# Altium PCB FM375_TEST_BOARD.PcbDoc (part 1 of 2)
Units mm, origin at the board's own origin, x right, y up, seen from the top; angles counter-clockwise.
Board outline 713.36 x 446.91 mm, 2 copper layers (Top Layer, Bottom Layer); 207 components, 223 nets, 969 pads, 41 vias.
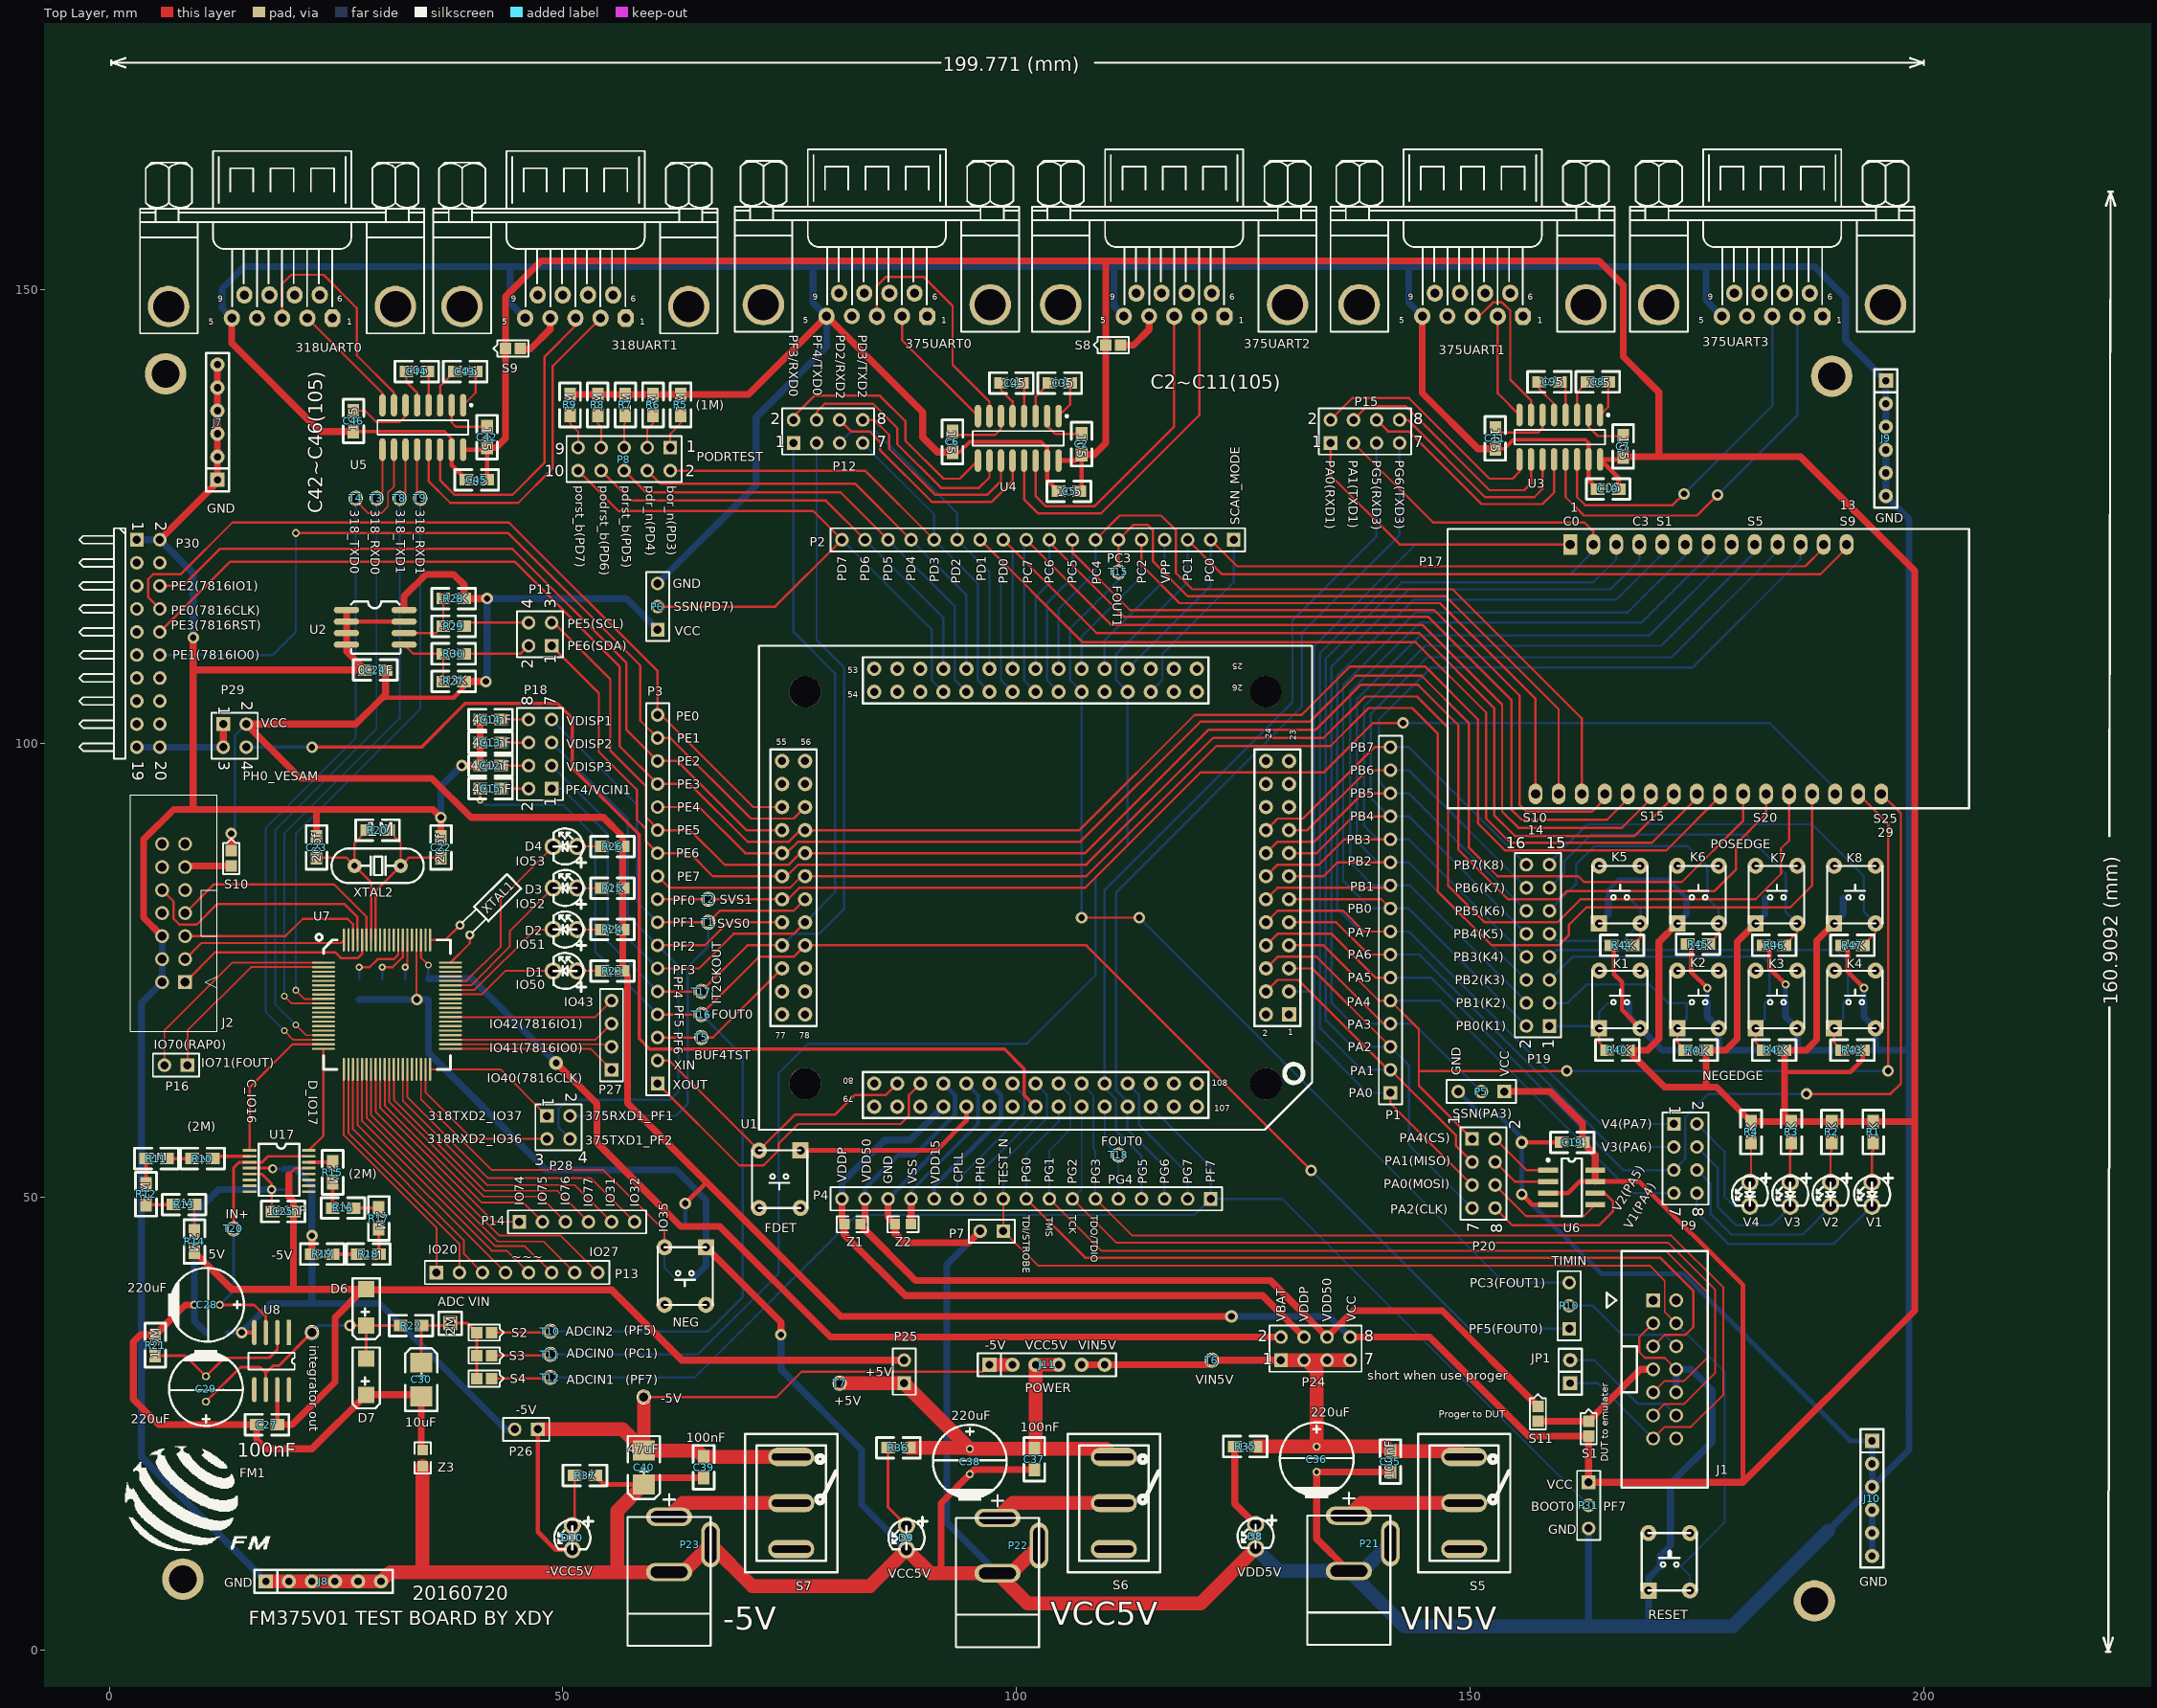
[diagram p0: Top Layer view]
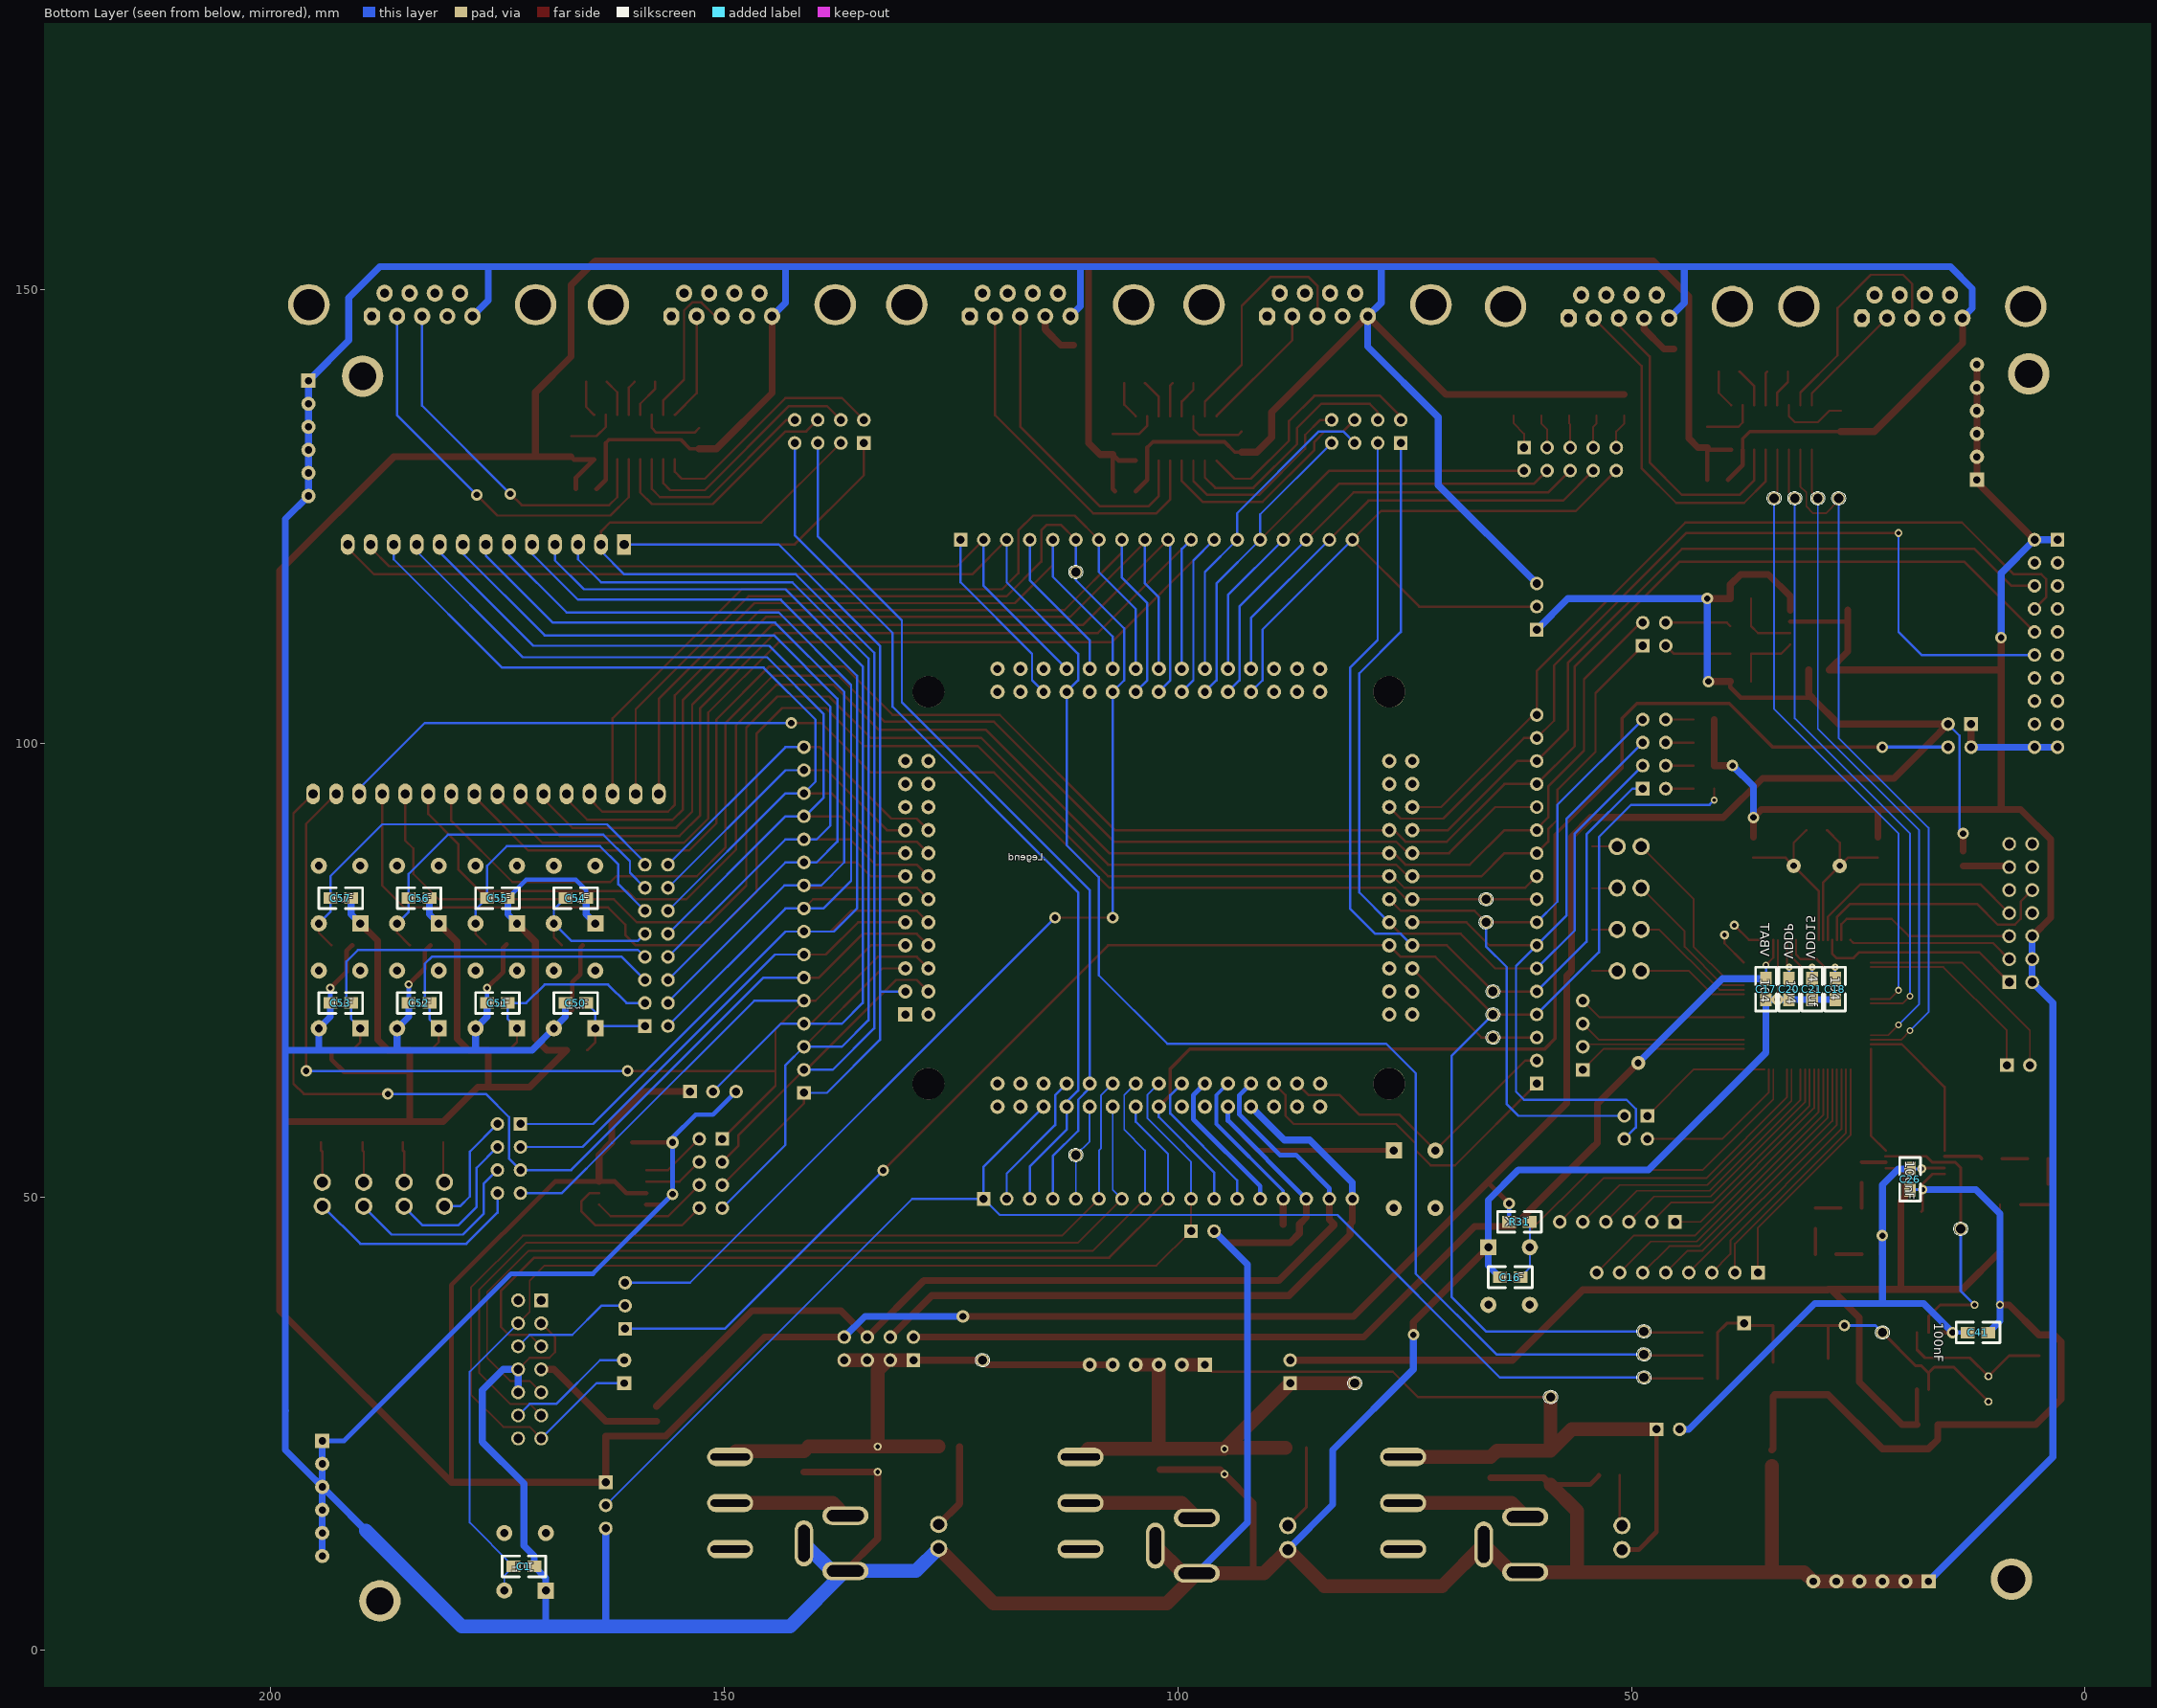
[diagram p1: Bottom Layer view, seen from below]

## Layer stack, top to bottom
Top Layer: signal copper 0.0356
Dielectric: dielectric 0.32, FR-4, Dk 4.8
Bottom Layer: signal copper 0.0356

## Board outline
-164.084,260.985 -164.084,-185.293 549.275,-185.293 549.275,261.62

## Design rules (kind name [scope] priority, off if disabled: settings)
Clearance [All] p1: gap=0.203
HoleSize [All] p1: absolutevalues=TRUE maxlimit=12.7 minlimit=0.025 maxpercent=80.000 minpercent=20.000
MinimumSolderMaskSliver [All] p1: minsoldermaskwidth=0
PolygonConnect [All] p1: connectstyle=Relief reliefconductorwidth=0.254 reliefentries=4 polygonreliefangle="90 Angle"
RoutingVias [All] p1: holewidth=0.711 width=1.27 viastyle="Through Hole" minholewidth=0.711 minwidth=1.27 maxholewidth=0.711 maxwidth=1.27
SilkToSilkClearance [All] p1: silktosilkclearance=0
SilkscreenOverComponentPads [All] p1: minsilkscreentomaskgap=0
SolderMaskExpansion [All] p1: expansion=0.102
TestPointUsage [All] p1: valid=0 allowmultiple=FALSE
Testpoint [All] p1: side=15 testpointundercomponent=TRUE minsize=1.016 maxsize=2.54 preferedsize=1.524 minholesize=0 maxholesize=1.016 preferedholesize=0.813 testpointgrid=0.025 style=1023 order=0-112345678
Width [All] p1: maxlimit=2.54 minlimit=0.152 preferedwidth=0.254
20 further rules are at their usual default settings.

## Components (designator, comment, footprint, x,y, rotation, side; value= is the part's Value field where it differs from the comment)
318UART0 "D Connector 9" DB9RA/M 24.613,146.863 r0 top
318UART1 "D Connector 9" DB9RA/M 56.947,146.863 r0 top
375UART0 "D Connector 9" DB9RA/M 90.17,147.066 r0 top
375UART1 "D Connector 9" DB9RA/M 155.829,147.066 r0 top
375UART2 "D Connector 9" DB9RA/M 122.936,147.066 r0 top
375UART3 "D Connector 9" DB9RA/M 188.849,147.066 r0 top
-5V "-5V" TEST_PT 58.928,27.94 r90 top
"ADC VIN" "ADCIN2" SIP1 37.592,36.068 r90 top
C1 "1uF" 0805 173.228,9.271 r180 bottom
C2 "105" 0805 107.188,134.112 r270 top
C3 "105" 0805 103.632,139.7 r0 top
C4 "105" 0805 100.584,139.7 r180 top
C5 "105" 0805 104.648,127.762 r0 top
C6 "105" 0805 92.964,134.366 r270 top
C7 "105" 0805 166.878,133.858 r270 top
C8 "105" 0805 162.941,139.827 r0 top
C9 "105" 0805 159.893,139.827 r180 top
C10 "105" 0805 164.084,128.016 r0 top
C11 "105" 0805 152.781,134.747 r270 top
C12 "470nF" 0805 43.18,97.536 r180 top
C13 "470nF" 0805 43.18,100.076 r180 top
C14 "470nF" 0805 43.18,102.616 r180 top
C15 "470nF" 0805 43.18,94.996 r180 top
C16 "1uF" 0805 62.23,41.148 r0 bottom
C17 "104" 0805 35.179,71.755 r90 bottom
C18 "104" 0805 27.559,71.755 r90 bottom
C19 "104" 0805 160.13,56.007 r0 top
C20 "104" 0805 32.639,71.755 r90 bottom
C21 "4.7uf" 0805 30.099,71.755 r90 bottom
C22 "20pf" 0805 36.576,87.376 r90 top
C23 "20pf" 0805 22.86,87.376 r90 top
C24 "0.1uF" 0805 28.194,108.077 r0 top
C25 "100nF" 0805 18.034,48.387 r0 top
C26 "100nF" 0805 19.304,50.8 r90 bottom
C27 "100nF" 0805 16.256,24.892 r0 top
C28 "220uF" NSM-EC 12.192,38.1 r90 top
C29 "220uF" NSM-EC 10.668,27.432 r0 top
C30 "10uF" SMD电容_B型_1 34.417,31.75 r90 top
C35 "100nF" 0805 141.224,21.971 r270 top
C36 "220uF" NSM-EC 133.096,22.479 r180 top
C37 "100nF" 0805 101.981,22.225 r270 top
C38 "220uF" NSM-EC 94.869,22.225 r180 top
C39 "100nF" 0805 65.532,21.336 r270 top
C40 "47uF" SMD电容_B型_1 58.928,18.288 r270 top
C41 "100nF" 0805 12.954,35.052 r180 bottom
C42 "105" 0805 41.656,134.874 r270 top
C43 "105" 0805 38.1,140.97 r0 top
C44 "105" 0805 35.052,140.97 r180 top
C45 "105" 0805 39.37,129.032 r0 top
C46 "105" 0805 26.924,134.366 r90 top
C50 "1uF" 0805 165.227,71.374 r0 bottom
C51 "1uF" 0805 173.863,71.374 r0 bottom
C52 "1uF" 0805 182.499,71.374 r0 bottom
C53 "1uF" 0805 191.135,71.374 r0 bottom
C54 "1uF" 0805 165.227,82.931 r0 bottom
C55 "1uF" 0805 173.863,82.931 r0 bottom
C56 "1uF" 0805 182.499,82.931 r0 bottom
C57 "1uF" 0805 191.135,82.931 r0 bottom
D1 "LED1" LED-DIODE0.1-BIGHOLE 51.536,74.904 r270 top
D2 "LED2" LED-DIODE0.1-BIGHOLE 51.536,79.476 r270 top
D3 "LED3" LED-DIODE0.1-BIGHOLE 51.536,84.048 r270 top
D4 "LED4" LED-DIODE0.1-BIGHOLE 51.536,88.62 r270 top
D6 "Diode" DIODE_M7 28.321,35.814 r90 top
D7 "Diode" DIODE_M7 28.321,28.194 r90 top
D8 "VDD5V" LED-DIODE0.1-BIGHOLE 126.365,13.843 r0 top
D9 "VCC5V" LED-DIODE0.1-BIGHOLE 87.884,13.716 r0 top
D10 "-VCC5V" LED-DIODE0.1-BIGHOLE 51.054,13.716 r0 top
FDET "KEY" BUTTON-S 76.2,48.768 r180 top
FM1 "FMSH_LOGO" FMSH-LOGO-1 1.524,22.86 r0 top
"integrator out" "MCO" TEST_PT 22.352,35.052 r90 top
J1 "GBI" HDR7X2-LP 170.18,38.608 r180 top
J2 "JTAG_318" JTAG_BIRD 7.112,81.28 r0 top
J7 "GND" SIP6 11.938,129.032 r90 top
J8 "GND" SIP6 17.272,7.62 r0 top
J9 "GND" SIP6 195.834,139.954 r270 top
J10 "GND" SIP6 194.31,23.114 r270 top
J11 "POWER" SIP6 97.028,31.496 r0 top
JP1 "" SIP2 161.036,29.464 r90 top
K1 "KEY" BUTTON-S 164.211,74.93 r0 top
K2 "KEY" BUTTON-S 172.847,74.93 r0 top
K3 "KEY" BUTTON-S 181.483,74.93 r0 top
K4 "KEY" BUTTON-S 190.119,74.93 r0 top
K5 "KEY" BUTTON-S 164.211,86.487 r0 top
K6 "KEY" BUTTON-S 172.847,86.487 r0 top
K7 "KEY" BUTTON-S 181.483,86.487 r0 top
K8 "KEY" BUTTON-S 190.119,86.487 r0 top
NEG "KEY" BUTTON-S 65.786,38.1 r180 top
P1 "IO_TEST_CON" HDR1X16 141.224,61.468 r90 top
P2 "IO_TEST_CON" HDR1X18 123.952,122.428 r180 top
P3 "IO_TEST_CON" HDR1X17 60.452,62.484 r90 top
P4 "IO_TEST_CON" HDR1X17 121.412,49.784 r180 top
P5 "SSN" HDR1X3 153.784,61.608 r180 top
P6 "SSN" HDR1X3 60.452,112.522 r90 top
P7 "Header 2" HDR1X2 98.552,46.228 r180 top
P8 "PODRTEST" HDR2X5 61.849,132.588 r180 top
P9 "Header 4X2" HDR2X4 172.466,58.039 r270 top
P10 "TIMIN" HDR1X3 160.931,35.458 r90 top
P11 "I2C_CON" HDR2X2 48.768,110.744 r90 top
P12 "Header 4X2" HDR2X4 75.438,133.096 r0 top
P13 "Header 8" HDR1X8 36.068,41.656 r0 top
P14 "Header 6" HDR1X6 45.212,47.244 r0 top
P15 "Header 4X2" HDR2X4 134.62,133.096 r0 top
P16 "Header 2" HDR1X2 8.636,64.516 r180 top
P17 "JX-H2154" JX-H2154 161.036,121.92 r0 top
P18 "DISP_CON" HDR2X4 48.768,94.996 r90 top
P19 "Header 8X2" HDR2X8 158.75,68.834 r90 top
P20 "Header 4X2" HDR2X4 150.224,56.388 r270 top
P21 "VIN5V" POWERJACK 136.652,14.859 r270 top
P22 "VCC5V" POWERJACK 97.917,14.605 r270 top
P23 "-5V" POWERJACK 61.722,14.732 r270 top
P24 "Header 4X2" HDR2X4 129.159,32.004 r0 top
P25 "Header 2" HDR1X2 87.63,29.464 r90 top
P26 "Header 2" HDR1X2 47.244,24.384 r180 top
P27 "Header 4" HDR1X4 55.372,64.008 r90 top
P28 "Header 2X2" HDR2X2 48.26,58.928 r270 top
P29 "Header 2X2" HDR2X2 12.573,102.108 r270 top
P30 "Header 10X2H" HDR2X10H 3.048,122.428 r270 top
P31 "BOOT0" HDR1X3 163.068,18.542 r270 top
R1 "1K" 0805 194.437,58.293 r270 top
R2 "1K" 0805 189.865,58.293 r270 top
R3 "1K" 0805 185.42,58.293 r270 top
R4 "1K" 0805 180.975,58.293 r270 top
R5 "1M" 0805 62.992,136.144 r90 top
R6 "1M" 0805 59.944,136.144 r90 top
R7 "1M" 0805 56.896,136.144 r90 top
R8 "1M" 0805 53.848,136.144 r90 top
R9 "1M" 0805 50.8,136.144 r90 top
R10 "2M" 0805 9.144,54.229 r0 top
R11 "2M" 0805 4.064,54.229 r0 top
R12 "2M" 0805 4.064,49.149 r90 top
R13 "2M" 0805 7.112,49.149 r0 top
R14 "2M" 0805 9.398,46.228 r270 top
R15 "2M" 0805 24.638,53.848 r270 top
R16 "2M" 0805 24.638,48.768 r0 top
R17 "2M" 0805 29.718,48.768 r270 top
R18 "2M" 0805 29.718,43.688 r180 top
R19 "2M" 0805 24.638,43.688 r180 top
R20 "1M" 0805 28.448,90.424 r0 top
R21 "1.5M" 0805 5.08,32.512 r90 top
R22 "2M" 0805 34.417,35.814 r180 top
R23 "1K" 0805 56.616,74.904 r180 top
R24 "1K" 0805 56.616,79.476 r180 top
R25 "1K" 0805 56.617,84.023 r180 top
R26 "1K" 0805 56.616,88.62 r180 top
R27 "3.3K" 0805 39.116,106.807 r180 top
R28 "3.3K" 0805 39.116,115.951 r180 top
R29 "300" 0805 36.83,112.903 r0 top
R30 "300" 0805 39.116,109.855 r180 top
R31 "10K" 0805 61.214,47.244 r0 bottom
R35 "1K" 0805 126.365,22.479 r180 top
R36 "1K" 0805 88.138,22.352 r180 top
R37 "1K" 0805 53.594,19.304 r180 top
R40 "10K" 0805 165.1,66.167 r0 top
R41 "10K" 0805 173.736,66.167 r0 top
R42 "10K" 0805 182.372,66.167 r0 top
R43 "10K" 0805 191.008,66.167 r0 top
R44 "10K" 0805 165.608,77.724 r0 top
R45 "10K" 0805 173.99,77.851 r0 top
R46 "10K" 0805 182.372,77.724 r0 top
R47 "10K" 0805 191.008,77.724 r0 top
RESET "KEY" BUTTON-S 169.672,12.954 r0 top
S1 "SHORT" 0603_SHORT_Y 163.068,25.273 r270 top
S2 "JUMPER" 0603_SHORT_Y 42.164,35.052 r180 top
S3 "JUMPER" 0603_SHORT_Y 42.164,32.512 r180 top
S4 "JUMPER" 0603_SHORT_Y 42.164,29.972 r180 top
S5 "SW-SPDT" SW2 149.352,21.336 r270 top
S6 "SW-SPDT" SW2 110.744,21.336 r270 top
S7 "SW-SPDT" SW2 75.184,21.336 r270 top
S8 "JUMPER" 0603_SHORT_Y 109.855,143.891 r0 top
S9 "JUMPER" 0603_SHORT_Y 43.688,143.51 r0 top
S10 "SHORT" 0603_SHORT_Y 13.462,88.138 r270 top
S11 "SHORT" 0603_SHORT_Y 157.48,26.924 r270 top
T1 "SVS0" TEST_PT 66.04,80.264 r0 top
T2 "SVS1" TEST_PT 66.04,82.804 r0 top
T3 "318_RXD0" TEST_PT 29.464,127 r0 top
T4 "318_TXD0" TEST_PT 27.178,127 r0 top
T5 "BUF4TST" TEST_PT 65.278,67.564 r0 top
T6 "VIN5V" TEST_PT 121.539,32.004 r0 top
T7 "+5V" TEST_PT 80.518,29.464 r0 top
T8 "318_TXD1" TEST_PT 32.004,127 r0 top
T9 "318_RXD1" TEST_PT 34.29,127 r0 top
T10 "ADCIN2" TEST_PT 48.641,35.179 r90 top
T11 "ADCIN0" TEST_PT 48.641,32.639 r0 top
T12 "ADCIN1" TEST_PT 48.641,30.099 r90 top
T15 "FOUT1" TEST_PT 111.252,118.872 r90 top
T16 "FOUT0" TEST_PT 65.278,70.104 r90 top
T17 "IT2CKOUT" TEST_PT 65.278,72.644 r90 top
T18 "FOUT0" TEST_PT 111.252,54.61 r90 top
T20 "IN+" TEST_PT 13.716,46.482 r180 top
U1 "FM375_SOCKET108" SOCKET108_LARGE 130.048,70.104 r180 top
U2 "24C32" SOIC8_SOP8 26.162,114.681 r0 top
U3 "MAX232CSE" NSO16_M 159.893,133.731 r270 top
U4 "MAX232CSE" NSO16_M 100.203,133.604 r270 top
U5 "MAX232CSE" NSO16_M 34.569,134.809 r270 top
U6 "25D40VS" SOP8-1.27 158.606,52.959 r0 top
U7 "FM318_LQFP80" LQFP80_12x12 23.622,75.819 r0 top
U8 "OPA2237" OPA237_SO8 19.812,35.052 r270 top
U17 "MAX312L" TSSOP16 15.494,55.118 r270 top
V1 "LED" LED-DIODE0.1-BIGHOLE 194.31,51.562 r0 top
V2 "LED" LED-DIODE0.1-BIGHOLE 189.738,51.562 r0 top
V3 "LED" LED-DIODE0.1-BIGHOLE 185.293,51.562 r0 top
V4 "LED" LED-DIODE0.1-BIGHOLE 180.848,51.562 r0 top
XTAL1 "32K" XTAL-RB32K_2 39.751,78.867 r135 top
XTAL2 "8M" XTAL-RAD0.2 27.051,86.487 r0 top
Z1 "MBs" 0603 82.804,46.99 r180 top
Z2 "MBs" 0603 88.392,46.99 r180 top
Z3 "MBs" 0603 34.544,22.098 r270 top

## Footprints (in the part's own frame and the unit in brackets; to place one, negate y for a bottom-side part, rotate by r counter-clockwise, add the part's x,y. Pads: shape width x height; smd on the part's side, far side on the other; paste and mask are expansions set on the pad)
0603 [mil]
  rect 45x45 smd: 1(0,0) 2(70,0)
  silkscreen extent -33,-35 102,36
0603_SHORT_Y [mil]
  rect 50x50 smd: 1(0,0) 2(65,0)
  silkscreen extent -52,-35 100,35
0805 [mil]
  rect 60x50 smd: 1(0,0) 2(90,0)
  silkscreen extent -50,-45 140,45
BUTTON-S [mil]
  rect 70x70 hole 35: 1(0,-250)
  round 70 hole 35: 2(180,-250) 3(0,0) 4(180,0)
  silkscreen extent -30,-250 210,0
DB9RA/M [mil]
  oct 70x75 hole 40: 1(0,0)
  oval 70x75 hole 40: 2(-109.17,0) 3(-218.33,0) 5(-436.67,0) 6(-55,100) 7(-164.17,100) 8(-273.33,100) 9(-382.5,100)
  round 70 hole 40: 4(-327.5,0)
  round 180 hole 135: BO1(-710.83,50) BO2(273.33,50)
  silkscreen extent -835,-67 398,725
DIODE_M7 [mm]
  rect 1.8x1.8 smd: 1(0,0) 2(4,0)
  silkscreen extent -1.5,-1.5 5.2,1.5
FMSH-LOGO-1 [mm]
  silkscreen extent 0.3,-11.8 16.23,-0.37
HDR1X2 [mm] "Connector; Header; 2 Position"
  rect 1.5x1.5 hole 0.9: 1(0,0)
  round 1.5 hole 0.9: 2(2.54,0)
  silkscreen extent -1.27,-1.27 3.81,1.27
HDR1X3 [mm] "Connector; Header; 3 Position"
  rect 1.5x1.5 hole 0.9: 1(0,0)
  round 1.5 hole 0.9: 2(2.54,0) 3(5.08,0)
  silkscreen extent -1.27,-1.27 6.35,1.27
HDR1X4 [mm] "Connector; Header; 4 Position"
  rect 1.5x1.5 hole 0.9: 1(0,0)
  round 1.5 hole 0.9: 2(2.54,0) 3(5.08,0) 4(7.62,0)
  silkscreen extent -1.27,-1.27 8.89,1.27
HDR1X6 [mm] "Connector; Header; 6 Position"
  rect 1.5x1.5 hole 0.9: 1(0,0)
  round 1.5 hole 0.9: 2(2.54,0) 3(5.08,0) 4(7.62,0) 5(10.16,0) 6(12.7,0)
  silkscreen extent -1.27,-1.27 13.97,1.27
HDR1X8 [mm] "Connector; Header; 8 Position"
  rect 1.5x1.5 hole 0.9: 1(0,0)
  round 1.5 hole 0.9: 2(2.54,0) 3(5.08,0) 4(7.62,0) 5(10.16,0) 6(12.7,0) 7(15.24,0) 8(17.78,0)
  silkscreen extent -1.27,-1.27 19.05,1.27
HDR1X16 [mm] "Connector; Header; 16 Position"
  rect 1.5x1.5 hole 0.9: 1(0,0)
  round 1.5 hole 0.9: 2(2.54,0) 3(5.08,0) 4(7.62,0) 5(10.16,0) 6(12.7,0) 7(15.24,0) 8(17.78,0) 9(20.32,0) 10(22.86,0) 11(25.4,0) 12(27.94,0) 13(30.48,0) 14(33.02,0) 15(35.56,0) 16(38.1,0)
  silkscreen extent -1.27,-1.27 39.37,1.27
HDR1X17 [mm] "Connector; Header; 17 Position"
  rect 1.5x1.5 hole 0.9: 1(0,0)
  round 1.5 hole 0.9: 2(2.54,0) 3(5.08,0) 4(7.62,0) 5(10.16,0) 6(12.7,0) 7(15.24,0) 8(17.78,0) 9(20.32,0) 10(22.86,0) 11(25.4,0) 12(27.94,0) 13(30.48,0) 14(33.02,0) 15(35.56,0) 16(38.1,0) 17(40.64,0)
  silkscreen extent -1.27,-1.27 41.91,1.27
HDR1X18 [mm] "Connector; Header; 18 Position"
  rect 1.5x1.5 hole 0.9: 1(0,0)
  round 1.5 hole 0.9: 2(2.54,0) 3(5.08,0) 4(7.62,0) 5(10.16,0) 6(12.7,0) 7(15.24,0) 8(17.78,0) 9(20.32,0) 10(22.86,0) 11(25.4,0) 12(27.94,0) 13(30.48,0) 14(33.02,0) 15(35.56,0) 16(38.1,0) 17(40.64,0) 18(43.18,0)
  silkscreen extent -1.27,-1.27 44.45,1.27
HDR2X2 [mm] "Connector; Header; 2x2 Position"
  rect 1.5x1.5 hole 0.9: 1(0,0)
  round 1.5 hole 0.9: 2(0,2.54) 3(2.54,0) 4(2.54,2.54)
  silkscreen extent -1.27,-1.27 3.81,3.81
HDR2X4 [mm] "Connector; Header; 4x2 Position"
  rect 1.5x1.5 hole 0.9: 1(0,0)
  round 1.5 hole 0.9: 2(0,2.54) 3(2.54,0) 4(2.54,2.54) 5(5.08,0) 6(5.08,2.54) 7(7.62,0) 8(7.62,2.54)
  silkscreen extent -1.27,-1.27 8.89,3.81
HDR2X5 [mm] "Connector; Header; 5x2 Position"
  rect 1.5x1.5 hole 0.9: 1(0,0)
  round 1.5 hole 0.9: 2(0,2.54) 3(2.54,0) 4(2.54,2.54) 5(5.08,0) 6(5.08,2.54) 7(7.62,0) 8(7.62,2.54) 9(10.16,0) 10(10.16,2.54)
  silkscreen extent -1.27,-1.27 11.43,3.81
HDR2X8 [mm] "Connector; Header; 8x2 Position"
  rect 1.5x1.5 hole 0.9: 1(0,0)
  round 1.5 hole 0.9: 2(0,2.54) 3(2.54,0) 4(2.54,2.54) 5(5.08,0) 6(5.08,2.54) 7(7.62,0) 8(7.62,2.54) 9(10.16,0) 10(10.16,2.54) 11(12.7,0) 12(12.7,2.54) 13(15.24,0) 14(15.24,2.54) 15(17.78,0) 16(17.78,2.54)
  silkscreen extent -1.27,-1.27 19.05,3.81
HDR2X10H [mm] "Connector; Header; 10x2 Position; Right Angle"
  rect 1.5x1.5 hole 0.9: 1(0,0)
  round 1.5 hole 0.9: 2(0,2.54) 3(2.54,0) 4(2.54,2.54) 5(5.08,0) 6(5.08,2.54) 7(7.62,0) 8(7.62,2.54) 9(10.16,0) 10(10.16,2.54) 11(12.7,0) 12(12.7,2.54) 13(15.24,0) 14(15.24,2.54) 15(17.78,0) 16(17.78,2.54) 17(20.32,0) 18(20.32,2.54) 19(22.86,0) 20(22.86,2.54)
  silkscreen extent -1.27,-6.35 24.13,-1.27
HDR7X2-LP [mil]
  rect 60x60 / inner round 60 / far side rect 60x60 hole 40: 1(0,0)
  round 60 hole 40: 2(-100,0) 3(0,100) 4(-100,100) 5(0,200) 6(-100,200) 7(0,300) 8(-100,300) 9(0,400) 10(-100,400) 11(0,500) 12(-100,500) 13(0,600) 14(-100,600)
  silkscreen extent -237,-213 201,812
JTAG_BIRD [mil]
  rect 60x60 / inner round 60 / far side rect 60x60 hole 40: 1(50,-300)
  round 60 hole 40: 2(-50,-300) 3(50,-200) 4(-50,-200) 5(50,-100) 6(-50,-100) 7(50,0) 8(-50,0) 9(50,100) 10(-50,100) 11(50,200) 12(-50,200) 13(50,300) 14(-50,300)
  silkscreen extent -188,-512 188,512
JX-H2154 [mil]
  rect 60x90 hole 40: 1(0,0)
  oval 60x90 hole 40: 2(100,0) 3(200,0) 4(300,0) 5(400,0) 6(500,0) 7(600,0) 8(700,0) 9(800,0) 10(900,0) 11(1000,0) 12(1100,0) 13(1200,0) 14(-150,-1082.68) 15(-50,-1082.68) 16(50,-1082.68) 17(150,-1082.68) 18(250,-1082.68) 19(350,-1082.68) 20(450,-1082.68) 21(550,-1082.68) 22(650,-1082.68) 23(750,-1082.68) 24(850,-1082.68) 25(950,-1082.68) 26(1050,-1082.68) 27(1150,-1082.68) 28(1250,-1082.68) 29(1350,-1082.68)
  silkscreen extent -532,-1146 1732,67
LED-DIODE0.1-BIGHOLE [mil]
  round 75 hole 48: A(0,2) K(0,-102)
  silkscreen extent -78,-100 90,40
LQFP80_12x12 [mm]
  oval 2.54x0.24 smd: 1(0,0) 2(0,-0.5) 3(0,-1) 4(0,-1.5) 5(0,-2) 6(0,-2.5) 7(0,-3) 8(0,-3.5) 9(0,-4) 10(0,-4.5) 11(0,-5) 12(0,-5.5) 13(0,-6) 14(0,-6.5) 15(0,-7) 16(0,-7.5) 17(0,-8) 18(0,-8.5) 19(0,-9) 20(0,-9.5) 41(14,-9.5) 42(14,-9) 43(14,-8.5) 44(14,-8) 45(14,-7.5) 46(14,-7) 47(14,-6.5) 48(14,-6) 49(14,-5.5) 50(14,-5) 51(14,-4.5) 52(14,-4) 53(14,-3.5) 54(14,-3) 55(14,-2.5) 56(14,-2) 57(14,-1.5) 58(14,-1) 59(14,-0.5) 60(14,0)
  oval 0.24x2.54 smd: 21(2.25,-11.75) 22(2.75,-11.75) 23(3.25,-11.75) 24(3.75,-11.75) 25(4.25,-11.75) 26(4.75,-11.75) 27(5.25,-11.75) 28(5.75,-11.75) 29(6.25,-11.75) 30(6.75,-11.75) 31(7.25,-11.75) 32(7.75,-11.75) 33(8.25,-11.75) 34(8.75,-11.75) 35(9.25,-11.75) 36(9.75,-11.75) 37(10.25,-11.75) 38(10.75,-11.75) 39(11.25,-11.75) 40(11.75,-11.75) 61(11.75,2.5) 62(11.25,2.5) 63(10.75,2.5) 64(10.25,2.5) 65(9.75,2.5) 66(9.25,2.5) 67(8.75,2.5) 68(8.25,2.5) 69(7.75,2.5) 70(7.25,2.5) 71(6.75,2.5) 72(6.25,2.5) 73(5.75,2.5) 74(5.25,2.5) 75(4.75,2.5) 76(4.25,2.5) 77(3.75,2.5) 78(3.25,2.5) 79(2.75,2.5) 80(2.25,2.5)
  silkscreen extent -0.83,-11.75 14,3.15
NSM-EC [mil]
  round 35 hole 20: 1(0,0) 2(0,110)
  silkscreen extent -160,-105 160,225
NSO16_M [mm] "16-Pin Small Outline Integrated Circuit 1.27 mm Pitch, IPC Low Density"
  oval 2.5x0.7 smd: 1(-2.45,4.445) 2(-2.45,3.175) 3(-2.45,1.905) 4(-2.45,0.635) 5(-2.45,-0.635) 6(-2.45,-1.905) 7(-2.45,-3.175) 8(-2.45,-4.445) 9(2.45,-4.445) 10(2.45,-3.175) 11(2.45,-1.905) 12(2.45,-0.635) 13(2.45,0.635) 14(2.45,1.905) 15(2.45,3.175) 16(2.45,4.445)
  silkscreen extent -2.57,-5 0.8,5.47, body extent -2,-5 2,5, height 1.75
OPA237_SO8 [mm]
  rect 2.77x0.51 smd: 1(0,0)
  oval 2.77x0.51 smd: 2(0,-1.27) 3(0,-2.54) 4(0,-3.81) 5(6.3,-3.81) 6(6.3,-2.54) 7(6.3,-1.27) 8(6.3,0)
  silkscreen extent 2.22,-4.44 4.08,0.64
POWERJACK [mil]
  oval 80x200 hole 50 slot 160 at 90 deg: 1(0,0) 3(240,0)
  oval 200x80 hole 50 slot 160 at 0 deg: 2(120,180)
  silkscreen extent -99,-180 560,180
SIP1 [mil]
  rect 62x62 hole 35: 1(0,0)
  silkscreen extent -50,-50 50,50
SIP2 [mil]
  rect 62x62 hole 32: 1(0,0)
  round 62 hole 32: 2(100,0)
  silkscreen extent -50,-50 150,50
SIP6 [mil]
  rect 62x62 hole 32: 1(0,0)
  round 62 hole 32: 2(100,0) 3(200,0) 4(300,0) 5(400,0) 6(500,0)
  silkscreen extent -50,-50 550,50
SMD电容_B型_1 [mm]
  rect 2.2x2.4 smd: 1(-0.011,0.009) 2(-3.751,0.009)
  silkscreen extent -5.34,-1.74 1.58,1.77
SOCKET108_LARGE [mil]
  round 137.8 hole 137.8: 0(100,300) 0(100,-1400) 0(2100,-1400) 0(2100,300)
  rect 62x62 hole 35: 1(0,0)
  round 62 hole 35: 2(100,0) 3(0,-100) 4(100,-100) 5(0,-200) 6(100,-200) 7(0,-300) 8(100,-300) 9(0,-400) 10(100,-400) 11(0,-500) 12(100,-500) 13(0,-600) 14(100,-600) 15(0,-700) 16(100,-700) 17(0,-800) 18(100,-800) 19(0,-900) 20(100,-900) 21(0,-1000) 22(100,-1000) 23(0,-1100) 24(100,-1100) 25(400,-1500) 26(400,-1400) 27(500,-1500) 28(500,-1400) 29(600,-1500) 30(600,-1400) 31(700,-1500) 32(700,-1400) 33(800,-1500) 34(800,-1400) 35(900,-1500) 36(900,-1400) 37(1000,-1500) 38(1000,-1400) 39(1100,-1500) 40(1100,-1400) 41(1200,-1500) 42(1200,-1400) 43(1300,-1500) 44(1300,-1400) 45(1400,-1500) 46(1400,-1400) 47(1500,-1500) 48(1500,-1400) 49(1600,-1500) 50(1600,-1400) 51(1700,-1500) 52(1700,-1400) 53(1800,-1500) 54(1800,-1400) 55(2200,-1100) 56(2100,-1100) 57(2200,-1000) 58(2100,-1000) 59(2200,-900) 60(2100,-900) 61(2200,-800) 62(2100,-800) 63(2200,-700) 64(2100,-700) 65(2200,-600) 66(2100,-600) 67(2200,-500) 68(2100,-500) 69(2200,-400) 70(2100,-400) 71(2200,-300) 72(2100,-300) 73(2200,-200) 74(2100,-200) 75(2200,-100) 76(2100,-100) 77(2200,0) 78(2100,0) 79(1800,400) 80(1800,300) 81(1700,400) 82(1700,300) 83(1600,400) 84(1600,300) 85(1500,400) 86(1500,300) 87(1400,400) 88(1400,300) 89(1300,400) 90(1300,300) 91(1200,400) 92(1200,300) 93(1100,400) 94(1100,300) 95(1000,400) 96(1000,300) 97(900,400) 98(900,300) 99(800,400) 100(800,300) 101(700,400) 102(700,300) 103(600,400) 104(600,300) 105(500,400) 106(500,300) 107(400,400) 108(400,300)
  silkscreen extent -100,-1600 2300,500
SOIC8_SOP8 [mil]
  oval 110x28 smd: 1(0,0) 2(0,-50) 3(0,-100) 4(0,-150) 5(250,-150) 6(250,-100) 7(250,-50) 8(250,0)
  silkscreen extent 20,-190 235,36
SOP8-1.27 [mm]
  rect 2.2x0.6 smd: 1(0,0) 2(0,-1.27) 3(0,-2.54) 4(0,-3.81) 5(5.2,-3.81) 6(5.2,-2.54) 7(5.2,-1.27) 8(5.2,0)
  silkscreen extent -0.15,-5.08 3.7,1.27
SW2 [mil]
  oval 80x200 hole 30 slot 170 at 90 deg: 1(0,0) 2(200,0) 3(400,0)
  silkscreen extent -100,-200 500,200
TEST_PT [mil]
  round 55 hole 40: 1(0,0)
  silkscreen extent -30,-30 30,30
TSSOP16 [mm]
  rect 0.3x1.5 smd: 1(0,0) 2(0.65,0) 3(1.3,0) 4(1.95,0) 5(2.6,0) 6(3.25,0) 7(3.9,0) 8(4.55,0) 9(4.55,6.5) 10(3.9,6.5) 11(3.25,6.5) 12(2.6,6.5) 13(1.95,6.5) 14(1.3,6.5) 15(0.65,6.5) 16(0,6.5)
  silkscreen extent -0.72,1 5,5.5
XTAL-RAD0.2 [mil]
  round 62 hole 28: 1(0,0) 2(200,0)
  silkscreen extent -100,-75 300,75
XTAL-RB32K_2 [mil]
  round 40 hole 20: 1(0,0) 2(60,0)
  silkscreen extent -15,-300 73,-14

## Part data
318UART0 318UART1 375UART0 375UART1 375UART2 375UART3: "Receptacle Assembly, 9 Position, Right Angle"
-5V T3 T4 T6 T7 T8 T9 T20: library part TEST_POINT
"ADC VIN" T1 T2 T5 T10 T11 T12 T15 T16 T17 T18: library part TEST_POINT2
C1 C16 C19 C39: library part CAP, "一般瓷片电容、直插选用RAD0.1，贴片选用0805"
C2 C3 C4 C5 C6 C7 C8 C9 C10 C11 C42 C43 C44 C45 C46: library part CAP
C12 C13 C14 C15 C24 C25 C26 C27 C35 C37 C41 C50 C51 C52 C53 C54 C55 C56 C57: library part CAP, "Capacitor"
C17 C18 C20 C21 C22 C23: library part Cap, "Capacitor"
C28 C29 C36 C38: library part ELECTRO1
C30: library part "Cap Pol1", "Polarized Capacitor (Radial)"
C40: library part "Cap Pol2", "Polarized Capacitor (Axial)"
D1 D2 D3 D4 D8 D9 D10: library part LED
D6 D7: "Default Diode"
FDET K1 K2 K3 K4 K5 K6 K7 K8 NEG RESET: library part SW-PB, "乒乓球按键（压下后接通，松开自动断开），较大按键尺寸12mmX12mm选用BUTTON-L封装，较小尺寸6mmX6mm选用BUTTON-S封装"
"integrator out": library part TP
J1 J2: library part "Header 7X2", "Header, 7-Pin, Dual row"
J7 J8 J9 J10 J11: library part CON6, "6pin的连接器，一般直插封装选用SIP6（间距2.54mm）"
JP1: library part JUMPER, "Jumper"
P1: library part "Header 16", "Header, 16-Pin"
P2: library part "Header 18", "Header, 18-Pin"
P3 P4: library part "Header 17", "Header, 17-Pin"
P5 P6 P10 P31: library part "Header 3", "Header, 3-Pin"
P7 P16 P25 P26: "Header, 2-Pin"
P8: library part "Header 5X2", "Header, 5-Pin, Dual row"
P9 P12 P15 P20 P24: "Header, 4-Pin, Dual row"
P11: library part "Header 2X2", "Header, 2-Pin, Dual row"
P13: "Header, 8-Pin"
P14: "Header, 6-Pin"
P17: library part LCD_JX-H2154
P18: library part "Header 4X2", "Header, 4-Pin, Dual row"
P19: "Header, 8-Pin, Dual row"
P21 P22 P23: library part 9VPOWE
P27: "Header, 4-Pin"
P28 P29: "Header, 2-Pin, Dual row"
P30: "Header, 10-Pin, Dual row, Right Angle"
R1 R2 R3 R4 R23 R24 R25 R26: library part RES1, "电阻，1/4w的金属膜直插可选AXIAL0.4封装（长度10mm），贴片可选0805封装，其他电阻可选AXIAL0.5～AXIAL1.0"
R5 R6 R7 R8 R9 R20 R27 R28 R29 R30 R31 R35 R36 R37 R40 R41 R42 R43 R44 R45 R46 R47: library part RES1
R10 R11 R12 R13 R14 R15 R16 R17 R18 R19 R21 R22: library part Res2, "Resistor"
S2 S3 S4 S8 S9: library part SHORT
S5 S6 S7: "SPDT Subminiature Toggle Switch, Right Angle Mounting, Vertical Actuation"
U2: library part 24CXX
U3 U4 U5: library part MAX232, "CI-MAX232CPE"
XTAL1 XTAL2: library part CRYSTAL, "Crystal"

## Free pads (board coordinates)
  round 4.572 hole 3.048: ""(6.223,140.716) ""(8.128,7.874) ""(187.96,5.461) ""(189.865,140.462)

## Via types
v1: diameter 1.27, hole 0.711, Top Layer to Bottom Layer, 23 vias
v2: diameter 0.762, hole 0.406, Top Layer to Bottom Layer, 8 vias
v3: diameter 0.914, hole 0.508, Top Layer to Bottom Layer, 3 vias
v4: diameter 1.397, hole 0.762, Top Layer to Bottom Layer, 2 vias
v5: diameter 1.016, hole 0.559, Top Layer to Bottom Layer, 2 vias
v6: diameter 0.889, hole 0.483, Top Layer to Bottom Layer, 1 vias
v7: diameter 0.762, hole 0.381, Top Layer to Bottom Layer, 1 vias
v8: diameter 1.524, hole 0.762, Top Layer to Bottom Layer, 1 vias

## Nets (pads, with @x,y where several pads share a name; then routed paths per layer and width w, separated by ;. In a path a pad name is that pad's centre, name@x,y a point inside that pad or via, vN(x,y) a via of type N, cw(c..) or ccw(c..) an arc to the next point about the centre after c; other vN are vias at no path point)
7816CLK: P3.17 P30.8 U1.59 | length 92.1
  Top Layer w0.254: P30.8@5.588,114.808 4.318,116.078 4.318,118.11 4.826,118.618 7.874,118.618 13.589,124.333 44.069,124.333 60.452,107.95 P3.17@60.452,103.124 60.833,103.124 70.993,92.964 U1.59@74.168,92.964
7816IO0: P3.16 P30.12 U1.60 | length 100.2
  Top Layer w0.254: v6(20.574,123.19) 43.942,123.19 58.547,108.585 58.547,102.489 P3.16@60.452,100.584 61.849,100.584 70.739,91.694 75.438,91.694 U1.60@76.708,92.964
  Bottom Layer w0.254: P30.12@5.588,109.728 18.034,109.728 20.574,112.268 v6(20.574,123.19)
7816IO1: P3.15 P30.6 U1.61 | length 87.4
  Top Layer w0.254: P30.6@5.588,117.348 8.128,117.348 12.192,121.412 44.45,121.412 57.023,108.839 57.023,101.473 P3.15@60.452,98.044 62.611,98.044 70.231,90.424 U1.61@74.168,90.424
7816RST: P3.14 P17.22 P30.10 U1.62 | length 218.9
  Top Layer w0.254: P30.10@5.588,112.268 13.335,120.015 44.704,120.015 56.261,108.458 56.261,99.695 P3.14@60.452,95.504 64.008,95.504 70.358,89.154 74.93,89.154 76.2,90.424 U1.62@76.708,90.424 106.934,90.424 119.634,103.124 131.445,103.124 136.779,108.458 145.034,108.458 150.876,102.616 150.876,91.186 153.873,88.189 171.628,88.189 177.546,94.107 P17.22@177.546,94.42
-5V: C26.2 C41.1 P26.2 R19.2 U8.4 U17.4 | length 63
  Top Layer w0.305: U17.4@15.494,53.168 17.952,53.168 v5(18.034,53.086)
  Top Layer w0.508: v1(14.605,35.052) U8.4@16.002,35.052
  Top Layer w0.762: R19.2@22.352,43.688 v1(22.352,45.72)
  Bottom Layer w0.305: v5(18.034,53.086) C26.2@19.304,53.086
  Bottom Layer w0.508: C41.1@12.954,35.052 v1(14.605,35.052)
  Bottom Layer w0.762: v1(14.605,35.052) 17.806,38.253 22.352,38.253 ; C26.2@19.304,53.086 20.611,53.086 22.352,51.345 v1(22.352,45.72) 22.352,38.253 ; P26.2@44.704,24.384 43.688,24.384 29.819,38.253 22.352,38.253
-VCC5V: -5V.1 C39.1 C40.2 D10.K J11.1 J11.2 P26.1 S7.1 | length 93.1
  Top Layer w0.254: -5V.1@58.928,27.94 73.533,27.94 76.327,30.734 96.266,30.734 J11.1@97.028,31.496
  Top Layer w0.508: P26.1@47.244,24.384 47.244,13.081 49.2,11.125 D10.K@51.054,11.125
  Top Layer w1.524: P26.1@47.244,24.384 56.592,24.384 C40.2@58.937,22.039 ; -5V.1@58.928,27.94 58.937,27.931 C40.2@58.937,22.039 ; S7.1@75.184,21.336 C39.1@65.532,21.336 64.829,22.039 C40.2@58.937,22.039 ; J11.1@97.028,31.496 J11.2@99.568,31.496
ADC0: P2.3 P17.13 S3.1 T11.1 U1.32 | length 225.9
  Top Layer w0.254: S3.1@42.164,32.512 48.514,32.512 T11.1@48.641,32.639 ; P2.3@118.872,122.428 122.682,118.618 188.595,118.618 191.516,121.539 P17.13@191.516,121.92
  Bottom Layer w0.254: T11.1@48.641,32.639 64.897,32.639 73.787,41.529 73.787,63.627 77.029,66.869 101.159,66.869 108.712,74.422 108.712,85.217 112.268,88.773 U1.32@112.268,105.664 110.998,106.934 110.998,109.855 118.872,117.729 P2.3@118.872,122.428
ADC1: P4.1 P31.2 S4.1 T12.1 U1.103 | length 156
  Top Layer w0.254: S4.1@42.164,29.972 48.514,29.972 T12.1@48.641,30.099
  Bottom Layer w0.254: T12.1@48.641,30.099 64.516,30.099 82.423,48.006 119.634,48.006 P4.1@121.412,49.784 ; U1.103@114.808,59.944 121.412,53.34 P4.1@121.412,49.784 ; P31.2@163.068,16.002 129.286,49.784 P4.1@121.412,49.784
ADC2: C15.2 P3.4 P10.1 S2.1 T10.1 T16.1 U1.72 | length 221.5
  Top Layer w0.254: v7(40.894,93.726) C15.2@40.894,94.996 ; S2.1@42.164,35.052 48.514,35.052 T10.1@48.641,35.179 ; P3.4@60.452,70.104 T16.1@65.278,70.104 71.628,76.454 75.438,76.454 U1.72@76.708,77.724 107.696,77.724 v1(132.498,52.922)
  Bottom Layer w0.254: v7(40.894,93.726) 41.402,93.218 50.038,93.218 53.594,89.662 53.594,76.962 P3.4@60.452,70.104 ; T10.1@48.641,35.179 66.04,35.179 69.85,38.989 69.85,65.532 T16.1@65.278,70.104 ; v1(132.498,52.922) 149.962,35.458 P10.1@160.931,35.458
AGND: C25.1 C26.1 C27.1 C28.2 C30.2 C41.2 D7.1 R21.2 U17.5 Z3.1 | length 88.8
  Top Layer w0.305: U17.5@15.494,52.518 16.824,52.518 17.907,51.435 v5(17.907,50.8) 17.907,48.514 C25.1@18.034,48.387
  Top Layer w0.762: C28.2@9.398,38.1 8.382,38.1 R21.2@5.08,34.798 3.429,34.798 2.667,34.036 2.667,27.686 5.461,24.892 C27.1@16.256,24.892 16.256,23.241 17.272,22.225 22.352,22.225 D7.1@28.321,28.194 34.213,28.194 C30.2@34.408,27.999 34.408,22.234 Z3.1@34.544,22.098
  Bottom Layer w0.305: v5(17.907,50.8) C26.1@19.304,50.8
  Bottom Layer w0.762: C41.2@10.668,35.052 9.398,36.322 C28.2@9.398,38.1 9.398,48.133 12.065,50.8 v5(17.907,50.8)
BD_TCK: J1.11 P4.7 U1.97 | length 103.6
  Top Layer w0.203: P4.7@106.172,49.784 110.998,44.958 171.831,44.958 177.038,39.751 177.038,30.607 173.609,27.178 171.45,27.178 J1.11@170.18,25.908
  Bottom Layer w0.203: P4.7@106.172,49.784 107.188,50.8 U1.97@107.188,59.944
BD_TDI: J1.5 P4.9 U1.95 | length 98.7
  Top Layer w0.254: P4.9@101.092,49.784 107.569,43.307 170.942,43.307 174.625,39.624 174.625,35.687 173.736,34.798 171.45,34.798 J1.5@170.18,33.528
  Bottom Layer w0.254: P4.9@101.092,49.784 101.092,54.737 104.648,58.293 U1.95@104.648,59.944
BD_TDO: J1.13 JP1.1 P4.6 U1.98 | length 119.8
  Top Layer w0.203: P4.6@108.712,49.784 112.776,45.72 172.212,45.72 177.927,40.005 177.927,28.194 174.371,24.638 171.45,24.638 J1.13@170.18,23.368
  Bottom Layer w0.203: U1.98@107.188,62.484 108.458,61.214 108.458,55.372 108.712,55.118 P4.6@108.712,49.784
  Bottom Layer w0.254: JP1.1@161.036,29.464 164.084,29.464 J1.13@170.18,23.368
BD_TMS: J1.9 P4.8 U1.96 | length 105.7
  Top Layer w0.203: P4.8@103.632,49.784 109.347,44.069 171.577,44.069 176.149,39.497 176.149,32.258 173.609,29.718 171.45,29.718 J1.9@170.18,28.448
  Bottom Layer w0.203: P4.8@103.632,49.784 103.632,55.118 105.918,57.404 105.918,61.214 U1.96@104.648,62.484
BOR_N: P2.14 P8.2 P12.7 U1.44 | length 65.5
  Top Layer w0.254: P8.2@61.849,130.048 83.312,130.048 P2.14@90.932,122.428
  Bottom Layer w0.254: P12.7@83.058,133.096 90.932,125.222 P2.14@90.932,122.428 95.758,117.602 95.758,106.934 U1.44@97.028,105.664
C_CHANEL: R10.2 U17.2 | length 4.2
  Top Layer w0.381: R10.2@11.43,54.229 11.669,54.468 U17.2@15.494,54.468
CHARGE: U7.19 U17.1 | length 17.1
  Top Layer w0.254: U17.1@15.494,55.118 15.494,62.103 20.21,66.819 U7.19@23.622,66.819
COM0: P1.1 P15.1 P17.1 P20.5 U1.3 | length 137
  Top Layer w0.254: P15.1@134.62,133.096 134.62,129.54 142.24,121.92 P17.1@161.036,121.92 ; P1.1@141.224,61.468 141.224,60.308 P20.5@150.224,51.308 P20.5@150.224,51.198
  Bottom Layer w0.254: U1.3@130.048,72.644 132.842,72.644 ; P1.1@141.224,61.468 138.684,61.468 132.842,67.31 132.842,72.644 ; P17.1@161.036,121.92 144.018,121.92 132.842,110.744 132.842,72.644
COM1: P1.2 P15.3 P17.2 P20.3 U1.4 | length 150.7
  Top Layer w0.254: U1.4@127.508,72.644 128.778,73.914 131.064,73.914 140.97,64.008 P1.2@141.224,64.008 148.463,56.769 148.463,55.609 P20.3@150.224,53.848 ; P15.3@137.16,133.096 145.923,124.333 162.609,124.333 163.576,123.366 P17.2@163.576,121.92
  Bottom Layer w0.254: P1.2@141.224,64.008 138.049,64.008 133.477,68.58 133.477,109.982 142.113,118.618 161.036,118.618 163.576,121.158 P17.2@163.576,121.92
COM2: P1.3 P17.3 P20.7 U1.5 | length 122.6
  Top Layer w0.254: U1.5@130.048,75.184 132.588,75.184 P1.3@141.224,66.548
  Bottom Layer w0.254: P20.7@150.224,48.768 143.256,55.736 143.256,64.516 P1.3@141.224,66.548 137.033,66.548 134.112,69.469 134.112,109.347 142.494,117.729 163.576,117.729 166.116,120.269 P17.3@166.116,121.92
COM3: P1.4 P5.2 P17.4 U1.6 | length 115.4
  Top Layer w0.254: U1.6@127.508,75.184 128.778,76.454 133.096,76.454 140.462,69.088 P1.4@141.224,69.088
  Bottom Layer w0.254: P5.2@151.244,61.608 143.764,69.088 P1.4@141.224,69.088 137.033,69.088 134.747,71.374 134.747,108.458 143.256,116.967 165.481,116.967 168.656,120.142 P17.4@168.656,121.92
CPLL: P4.12 U1.92 | length 16.3
  Bottom Layer w0.254: P4.12@93.472,49.784 93.472,51.816 100.838,59.182 100.838,61.214 U1.92@99.568,62.484
D_CHANEL: R15.1 U17.14 | length 2.7
  Top Layer w0.381: U17.14@21.994,53.818 24.608,53.818 R15.1@24.638,53.848
DISCHARGE: U7.20 U17.16 | length 11.9
  Top Layer w0.254: U17.16@21.994,55.118 23.622,56.746 U7.20@23.622,66.319
FM318_RXD0: T3.1 U5.9 U7.17 | length 72.8
  Top Layer w0.203: v2(20.574,68.961) 21.716,67.819 U7.17@23.622,67.819 ; T3.1@29.464,127 30.124,127.66 U5.9@30.124,132.359
  Bottom Layer w0.203: v2(20.574,68.961) 18.288,71.247 18.288,90.424 29.464,101.6 T3.1@29.464,127
FM318_RXD1: T9.1 U5.12 U7.9 | length 68.9
  Top Layer w0.203: v2(20.574,72.771) 21.526,71.819 U7.9@23.622,71.819 ; U5.12@33.934,132.359 33.934,127.356 T9.1@34.29,127
  Bottom Layer w0.203: v2(20.574,72.771) 20.574,90.043 34.29,103.759 T9.1@34.29,127
FM318_RXD2: P28.3 U7.39 | length 18.1
  Top Layer w0.203: U7.39@34.872,64.069 34.872,61.521 40.005,56.388 P28.3@48.26,56.388
FM318_TXD0: T4.1 U5.10 U7.18 | length 79.6
  Top Layer w0.203: v2(19.304,68.326) 20.311,67.319 U7.18@23.622,67.319 ; T4.1@27.178,127 27.178,126.746 28.575,125.349 29.972,125.349 30.734,126.111 30.734,127.635 31.394,128.295 U5.10@31.394,132.359
  Bottom Layer w0.203: v2(19.304,68.326) 17.272,70.358 17.272,90.678 27.178,100.584 T4.1@27.178,127
FM318_TXD1: T8.1 U5.11 U7.10 | length 70.4
  Top Layer w0.203: v2(19.304,72.136) 20.121,71.319 U7.10@23.622,71.319 ; T8.1@32.004,127 32.664,127.66 U5.11@32.664,132.359
  Bottom Layer w0.203: v2(19.304,72.136) 19.304,90.043 32.004,102.743 T8.1@32.004,127
FM318_TXD2: P28.1 U7.40 | length 15
  Top Layer w0.203: U7.40@35.372,64.069 43.119,64.069 P28.1@48.26,58.928
FM375_RXD0: P12.2 U4.9 | length 27.5
  Top Layer w0.254: P12.2@75.438,135.636 75.438,136.017 77.724,138.303 84.963,138.303 87.757,135.509 87.757,133.35 91.948,129.159 93.763,129.159 U4.9@95.758,131.154
FM375_RXD1: P15.2 U3.9 | length 27.2
  Top Layer w0.254: P15.2@134.62,135.636 137.033,138.049 143.256,138.049 152.146,129.159 154.686,129.159 155.448,129.921 U3.9@155.448,131.281
FM375_RXD2: P12.6 U4.12 | length 26.5
  Top Layer w0.254: P12.6@80.518,135.636 81.788,134.366 83.82,134.366 84.963,133.223 84.963,132.334 90.678,126.619 97.282,126.619 99.568,128.905 U4.12@99.568,131.154
FM375_RXD3: P15.6 U3.12 | length 27.6
  Top Layer w0.254: P15.6@139.7,135.636 140.97,134.366 143.256,134.366 151.257,126.365 157.988,126.365 159.258,127.635 U3.12@159.258,131.281
FM375_TXD0: P12.4 U4.10 | length 27.5
  Top Layer w0.254: P12.4@77.978,135.636 77.978,136.525 78.867,137.414 84.201,137.414 86.868,134.747 86.868,132.969 91.694,128.143 95.885,128.143 97.028,129.286 U4.10@97.028,131.154
FM375_TXD1: P15.4 U3.10 | length 27
  Top Layer w0.254: P15.4@137.16,135.636 138.684,137.16 142.875,137.16 152.146,127.889 155.956,127.889 156.718,128.651 U3.10@156.718,131.281
FM375_TXD2: P12.8 U4.11 | length 22.4
  Top Layer w0.254: P12.8@83.058,135.636 84.328,135.636 85.979,133.985 85.979,132.461 91.059,127.381 96.774,127.381 98.298,128.905 U4.11@98.298,131.154
FM375_TXD3: P15.8 U3.11 | length 22.9
  Top Layer w0.254: P15.8@142.24,135.636 143.129,135.636 151.638,127.127 157.099,127.127 157.988,128.016 U3.11@157.988,131.281
FOUT: P16.1 U7.2 | length 21.7
  Top Layer w0.203: P16.1@8.636,64.516 8.636,68.326 15.629,75.319 U7.2@23.622,75.319
GND: 318UART0.5 318UART1.5 375UART0.5 375UART1.5 375UART2.5 375UART3.5 C1.2 C5.1 C6.2 C10.1 C11.2 C12.2 C13.2 C14.2 C16.2 C17.1 C18.1 C19.1 C20.1 C21.1 C22.2 C23.2 C24.1 C35.2 C36.2 C37.2 C38.2 C39.2 C40.1 C45.1 C46.1 C50.2 C51.2 C52.2 C53.2 D8.K D9.K FDET.1 J1.3 J1.8 J1.10 J2.2 J2.4 J2.6 J7.1 J7.2 J7.3 J7.4 J7.5 J7.6 J8.1 J8.2 J8.3 J8.4 J8.5 J8.6 J9.1 J9.2 J9.3 J9.4 J9.5 J9.6 J10.1 J10.2 J10.3 J10.4 J10.5 J10.6 K1.2 K2.2 K3.2 K4.2 NEG.1 P4.15 P5.3 P6.3 P7.2 P21.2 P21.3 P22.2 P22.3 P23.2 P23.3 P30.1 P30.2 P31.3 R5.2 R6.2 R7.2 R8.2 R9.2 R37.1 R44.1 R45.1 R46.1 R47.1 RESET.1 U1.87 U2.1 U2.2 U2.3 U2.4 U2.7 U3.15 U4.15 U5.15 U6.4 U7.64 Z2.2 Z3.2 | length 1471.2
  Top Layer w0.203: v1@33.872,71.755 U7.64@33.872,78.319
  Top Layer w0.254: J1.3@170.18,36.068 168.656,34.544 168.656,32.892 169.29,32.258 171.45,32.258 J1.8@172.72,30.988
  Top Layer w0.381: C46.1@26.924,134.366 36.957,134.366 37.744,133.579 U5.15@37.744,132.359 ; C6.2@92.964,132.08 93.726,132.08 94.869,133.223 102.743,133.223 103.378,132.588 ; C11.2@152.781,132.461 153.797,132.461 154.813,133.477 162.687,133.477 163.068,133.096
  Top Layer w0.508: U2.2@26.162,113.411 U2.7@32.512,113.411 ; U5.15@37.744,132.359 37.744,130.658 C45.1@39.37,129.032 ; R37.1@53.594,19.304 54.599,18.299 C40.1@58.937,18.299 ; FDET.1@76.2,55.118 91.186,55.118 94.488,58.42 U1.87@94.488,59.944 ; 103.378,132.588 U4.15@103.378,131.154 103.378,129.032 C5.1@104.648,127.762 ; v1(155.702,50.292) 156.845,49.149 U6.4@158.606,49.149 ; v4(155.702,56.007) C19.1@160.13,56.007 ; 163.068,133.096 U3.15@163.068,131.281 163.068,129.032 C10.1@164.084,128.016 ; R44.1@165.608,77.724 165.862,77.47 165.862,74.549 166.751,73.66 166.751,70.612 K1.2@168.783,68.58 ; R45.1@173.99,77.851 174.371,77.47 174.371,74.803 v3(176.149,73.025) ; R46.1@182.372,77.724 183.007,77.089 183.007,75.184 v3(184.785,73.406) ; R47.1@191.008,77.724 191.643,77.089 191.643,74.803 v3(193.421,73.025)
  Top Layer w0.762: P30.2@5.588,122.428 11.938,128.778 J7.1@11.938,129.032 J7.2@11.938,131.572 J7.3@11.938,134.112 J7.4@11.938,136.652 J7.5@11.938,139.192 J7.6@11.938,141.732 ; J2.6@5.842,78.74 3.81,80.772 3.81,89.408 7.112,92.71 9.271,92.71 ; v1(9.271,111.633) 9.271,108.077 ; 318UART0.5@13.521,146.863 13.521,144.086 23.241,134.366 C46.1@26.924,134.366 ; C23.2@22.86,89.662 22.86,92.583 22.987,92.71 ; U2.1@26.162,114.681 U2.3@26.162,112.141 26.162,110.109 C24.1@28.194,108.077 9.271,108.077 ; C22.2@36.576,89.662 v1(36.576,91.821) 35.687,92.71 22.987,92.71 ; v1(38.862,97.536) C12.2@40.894,97.536 C13.2@40.894,100.076 C14.2@40.894,102.616 ; R9.2@50.8,138.43 R8.2@53.848,138.43 R7.2@56.896,138.43 R6.2@59.944,138.43 R5.2@62.992,138.43 70.443,138.43 375UART0.5@79.079,147.066 89.662,136.483 89.662,133.731 91.313,132.08 C6.2@92.964,132.08 ; C40.1@58.937,18.299 59.688,19.05 C39.2@65.532,19.05 ; NEG.1@65.786,44.45 74.041,36.195 v1(74.041,34.798) ; P4.15@85.852,49.784 85.852,47.752 Z2.2@86.614,46.99 86.614,45.974 87.63,44.958 94.742,44.958 P7.2@96.012,46.228 ; 91.694,8.509 91.694,16.256 C38.2@94.869,19.431 95.377,19.939 C37.2@101.981,19.939 ; P21.3@136.652,8.763 133.096,12.319 C36.2@133.096,19.685 C35.2@141.224,19.685 ; 375UART1.5@144.738,147.066 144.738,138.599 150.876,132.461 C11.2@152.781,132.461 ; 9.271,92.71 9.271,108.077 ; 9.271,92.71 22.987,92.71
  Top Layer w1.524: J8.1@17.272,7.62 J8.2@19.812,7.62 J8.3@22.352,7.62 J8.4@24.892,7.62 J8.5@27.432,7.62 J8.6@29.972,7.62 30.988,8.636 34.29,8.636 ; Z3.2@34.544,20.32 34.544,8.89 34.29,8.636 ; C40.1@58.937,18.299 56.007,15.369 56.007,8.636 ; P22.2@102.489,11.557 99.441,8.509 P22.3@97.917,8.509 ; D8.K@126.365,11.252 120.32,5.207 101.219,5.207 P22.3@97.917,8.509 ; 34.29,8.636 56.007,8.636 ; 56.007,8.636 P23.3@61.722,8.636 63.246,8.636 P23.2@66.294,11.684 70.866,7.112 83.871,7.112 D9.K@87.884,11.125 90.5,8.509 91.694,8.509 P22.3@97.917,8.509
  Bottom Layer w0.508: P4.15@85.852,49.784 94.488,58.42 U1.87@94.488,59.944 ; P5.3@148.704,61.608 151.257,59.055 153.162,59.055 155.702,56.515 v4(155.702,56.007) v1(155.702,50.292) 164.465,41.529 173.482,41.529 191.897,23.114 J10.1@194.31,23.114 ; C51.2@176.149,71.374 v3(176.149,73.025) ; C52.2@184.785,71.374 v3(184.785,73.406) ; C53.2@193.421,71.374 v3(193.421,73.025)
  Bottom Layer w0.762: P30.1@3.048,122.428 P30.2@5.588,122.428 9.271,118.745 v1(9.271,111.633) ; J2.6@5.842,78.74 J2.4@5.842,76.2 J2.2@5.842,73.66 3.556,71.374 3.556,59.944 3.556,21.336 J8.1@17.272,7.62 ; 318UART0.5@13.521,146.863 12.446,147.938 12.446,150.114 14.859,152.527 44.196,152.527 ; C18.1@27.559,71.755 C21.1@30.099,71.755 C20.1@32.639,71.755 v1(33.909,71.755) C17.1@35.179,71.755 35.179,65.913 48.133,52.959 62.484,52.959 65.786,49.657 NEG.1@65.786,44.45 65.786,42.418 C16.2@64.516,41.148 ; v1(36.576,91.821) 36.576,95.25 v1(38.862,97.536) ; 318UART1.5@45.855,146.863 44.196,148.522 44.196,152.527 ; P6.3@60.452,117.602 71.306,128.456 71.306,135.949 79.079,143.722 375UART0.5@79.079,147.066 77.597,148.548 77.597,152.527 ; v1(74.041,34.798) 74.041,30.988 82.931,22.098 82.931,16.078 D9.K@87.884,11.125 ; P7.2@96.012,46.228 92.329,42.545 92.329,14.097 P22.3@97.917,8.509 ; 375UART2.5@111.845,147.066 110.744,148.167 110.744,152.527 ; 375UART1.5@144.738,147.066 143.256,148.548 143.256,152.527 ; 163.068,2.667 P31.3@163.068,13.462 ; C50.2@167.513,71.374 167.513,69.85 K1.2@168.783,68.58 171.196,66.167 177.546,66.167 ; 169.672,2.667 RESET.1@169.672,6.604 169.672,8.001 C1.2@170.942,9.271 170.942,10.414 172.085,11.557 172.085,18.409 176.663,22.987 176.663,28.696 174.371,30.988 J1.8@172.72,30.988 J1.10@172.72,28.448 ; C51.2@176.149,71.374 176.149,69.85 K2.2@177.419,68.58 177.419,66.294 177.546,66.167 ; 375UART3.5@177.758,147.066 176.022,148.802 176.022,152.527 ; C52.2@184.785,71.374 184.785,69.85 K3.2@186.055,68.58 186.055,66.167 ; 189.484,13.208 193.04,16.764 197.226,20.95 198.374,22.098 198.374,26.416 ; C53.2@193.421,71.374 193.421,69.85 K4.2@194.691,68.58 194.691,66.421 194.945,66.167 ; J10.6@194.31,10.414 J10.5@194.31,12.954 J10.4@194.31,15.494 J10.3@194.31,18.034 J10.2@194.31,20.574 J10.1@194.31,23.114 ; 198.357,26.433 198.374,26.416 ; 44.196,152.527 77.597,152.527 ; 77.597,152.527 110.744,152.527 ; 110.744,152.527 143.256,152.527 ; 143.256,152.527 176.022,152.527 ; 176.022,152.527 187.96,152.527 191.389,149.098 191.389,144.399 J9.1@195.834,139.954 J9.6@195.834,127.254 198.374,124.714 198.374,66.167 ; 177.546,66.167 186.055,66.167 ; 186.055,66.167 194.945,66.167 ; 194.945,66.167 198.374,66.167 ; 198.374,26.416 198.374,66.167
  Bottom Layer w1.524: D8.K@126.365,11.252 128.854,8.763 P21.3@136.652,8.763 ; P21.2@141.224,11.811 138.176,8.763 P21.3@136.652,8.763 ; 189.484,13.208 178.943,2.667 169.672,2.667 163.068,2.667 142.748,2.667 P21.3@136.652,8.763
GPIO20: P13.1 U7.21 | length 26.6
  Top Layer w0.203: U7.21@25.872,64.069 25.872,56.805 36.068,46.609 P13.1@36.068,41.656
GPIO21: P13.2 U7.22 | length 27.5
  Top Layer w0.203: U7.22@26.372,64.069 26.372,57.067 38.608,44.831 P13.2@38.608,41.656
GPIO22: P13.3 U7.23 | length 28.3
  Top Layer w0.203: U7.23@26.872,64.069 26.872,57.456 39.116,45.212 39.116,43.688 P13.3@41.148,41.656
GPIO23: P13.4 U7.24 | length 29.2
  Top Layer w0.203: U7.24@27.372,64.069 27.372,57.972 P13.4@43.688,41.656
GPIO24: P13.5 U7.25 | length 31
  Top Layer w0.203: U7.25@27.872,64.069 27.872,58.361 42.164,44.069 43.815,44.069 P13.5@46.228,41.656
GPIO25: P13.6 U7.26 | length 32.8
  Top Layer w0.203: U7.26@28.372,64.069 28.372,58.75 42.545,44.577 45.847,44.577 P13.6@48.768,41.656
GPIO26: P13.7 U7.27 | length 34.7
  Top Layer w0.203: U7.27@28.872,64.069 28.872,59.012 42.799,45.085 47.879,45.085 P13.7@51.308,41.656
GPIO27: P13.8 U7.28 | length 36.5
  Top Layer w0.203: U7.28@29.372,64.069 29.372,59.401 43.053,45.72 49.784,45.72 P13.8@53.848,41.656
GPIO31: P14.5 U7.34 | length 32
  Top Layer w0.203: U7.34@32.372,64.069 32.372,60.592 41.656,51.308 51.308,51.308 P14.5@55.372,47.244
GPIO32: P14.6 U7.35 | length 33.8
  Top Layer w0.203: U7.35@32.872,64.069 32.872,60.981 41.783,52.07 53.086,52.07 P14.6@57.912,47.244
GPIO40: P27.1 U7.41 | length 18.7
  Top Layer w0.203: U7.41@37.622,66.319 53.061,66.319 P27.1@55.372,64.008
GPIO41: P27.2 U7.42 | length 17.9
  Top Layer w0.203: U7.42@37.622,66.819 55.101,66.819 P27.2@55.372,66.548
GPIO42: P27.3 U7.43 | length 18.5
  Top Layer w0.203: U7.43@37.622,67.319 53.603,67.319 P27.3@55.372,69.088
GPIO43: P27.4 U7.48 | length 18.5
  Top Layer w0.203: U7.48@37.622,69.819 53.563,69.819 P27.4@55.372,71.628
GPIO50: D1.K U7.53 | length 12.4
  Top Layer w0.203: U7.53@37.622,72.319 41.077,72.319 43.662,74.904 D1.K@48.945,74.904
GPIO51: D2.K U7.54 | length 14.1
  Top Layer w0.203: U7.54@37.622,72.819 40.307,72.819 46.964,79.476 D2.K@48.945,79.476
GPIO52: D3.K U7.55 | length 16.8
  Top Layer w0.203: U7.55@37.622,73.319 39.918,73.319 44.161,77.562 44.161,79.263 D3.K@48.945,84.048
GPIO53: D4.K U7.56 | length 20.5
  Top Layer w0.203: U7.56@37.622,73.819 39.402,73.819 43.18,77.597 43.18,82.855 D4.K@48.945,88.62
GPIO74: P14.1 U7.29 | length 24.8
  Top Layer w0.203: U7.29@29.872,64.069 29.872,59.79 42.418,47.244 P14.1@45.212,47.244
GPIO75: P14.2 U7.30 | length 26.7
  Top Layer w0.203: U7.30@30.372,64.069 30.372,60.052 41.021,49.403 45.593,49.403 P14.2@47.752,47.244
GPIO76: P14.3 U7.31 | length 28.5
  Top Layer w0.203: U7.31@30.872,64.069 30.872,60.441 41.275,50.038 47.498,50.038 P14.3@50.292,47.244
GPIO77: P14.4 U7.32 | length 30.4
  Top Layer w0.203: U7.32@31.372,64.069 31.372,60.703 41.402,50.673 49.403,50.673 P14.4@52.832,47.244
I2C_SCL: P11.4 R29.2 | length 7.3
  Top Layer w0.254: R29.2@39.116,112.903 39.497,113.284 P11.4@46.228,113.284
I2C_SDA: P11.2 R30.1 | length 7.5
  Top Layer w0.254: R30.1@39.116,109.855 45.339,109.855 P11.2@46.228,110.744
IN+: C28.1 T20.1 U8.3 U17.3 U17.15 | length 31.9
  Top Layer w0.305: C28.1@12.192,38.1 16.002,38.1 17.272,36.83 U8.3@17.272,35.052 ; T20.1@13.716,46.482 13.716,53.213 14.321,53.818 U17.3@15.494,53.818 16.861,53.818 17.511,54.468 U17.15@21.994,54.468
  Bottom Layer w0.305: C28.1@12.192,38.1 13.716,39.624 T20.1@13.716,46.482
KEY1: C50.1 K1.1 P19.1 R40.1 | length 11.6
  Top Layer w0.254: K1.1@164.211,68.58 164.211,67.056 R40.1@165.1,66.167
  Bottom Layer w0.254: P19.1@158.75,68.834 163.957,68.834 K1.1@164.211,68.58 164.211,70.358 C50.1@165.227,71.374
KEY2: C51.1 K2.1 P19.3 R41.1 | length 22.8
  Top Layer w0.254: K2.1@172.847,68.58 172.847,67.056 R41.1@173.736,66.167
  Bottom Layer w0.254: P19.3@158.75,71.374 160.782,71.374 162.814,73.406 169.799,73.406 171.831,71.374 C51.1@173.863,71.374 173.863,69.596 K2.1@172.847,68.58
KEY3: C52.1 K3.1 P19.5 R42.1 | length 36.1
  Top Layer w0.254: K3.1@181.483,68.58 181.483,67.056 R42.1@182.372,66.167
  Bottom Layer w0.254: P19.5@158.75,73.914 161.29,76.454 182.245,76.454 183.007,75.692 183.007,71.882 C52.1@182.499,71.374 182.499,69.596 K3.1@181.483,68.58
KEY4: C53.1 K4.1 P19.7 R43.1 | length 44.5
  Top Layer w0.254: K4.1@190.119,68.58 190.119,67.056 R43.1@191.008,66.167
  Bottom Layer w0.254: P19.7@158.75,76.454 159.512,77.216 190.373,77.216 191.643,75.946 191.643,71.882 C53.1@191.135,71.374 191.135,69.596 K4.1@190.119,68.58
KEY5: C54.2 K5.2 P19.9 R44.2 | length 17.2
  Top Layer w0.254: R44.2@167.894,77.724 168.783,78.613 K5.2@168.783,80.137
  Bottom Layer w0.254: P19.9@158.75,78.994 159.512,78.232 166.878,78.232 K5.2@168.783,80.137 168.783,81.661 C54.2@167.513,82.931
KEY6: C55.2 K6.2 P19.11 R45.2 | length 32.1
  Top Layer w0.254: R45.2@176.276,77.851 177.419,78.994 K6.2@177.419,80.137
  Bottom Layer w0.254: P19.11@158.75,81.534 161.671,84.455 161.671,86.614 163.703,88.646 173.99,88.646 176.149,86.487 C55.2@176.149,82.931 177.419,81.661 K6.2@177.419,80.137
KEY7: C56.2 K7.2 P19.13 R46.2 | length 40
  Top Layer w0.254: R46.2@184.658,77.724 186.055,79.121 K7.2@186.055,80.137
  Bottom Layer w0.254: P19.13@158.75,84.074 160.401,85.725 160.401,86.995 163.322,89.916 180.467,89.916 184.785,85.598 C56.2@184.785,82.931 184.785,81.407 K7.2@186.055,80.137